# Altium PCB LEDArrayFPC_24LED.PcbDoc (part 2 of 2)
Units mil, origin at the board's own origin, x right, y up, seen from the top; angles counter-clockwise.
Board outline 6000 x 4000 mil, 2 copper layers (Top Layer, Bottom Layer); 48 components, 25 nets, 486 pads, 144 vias.
Unrouted connection lines stored in the file: 29.
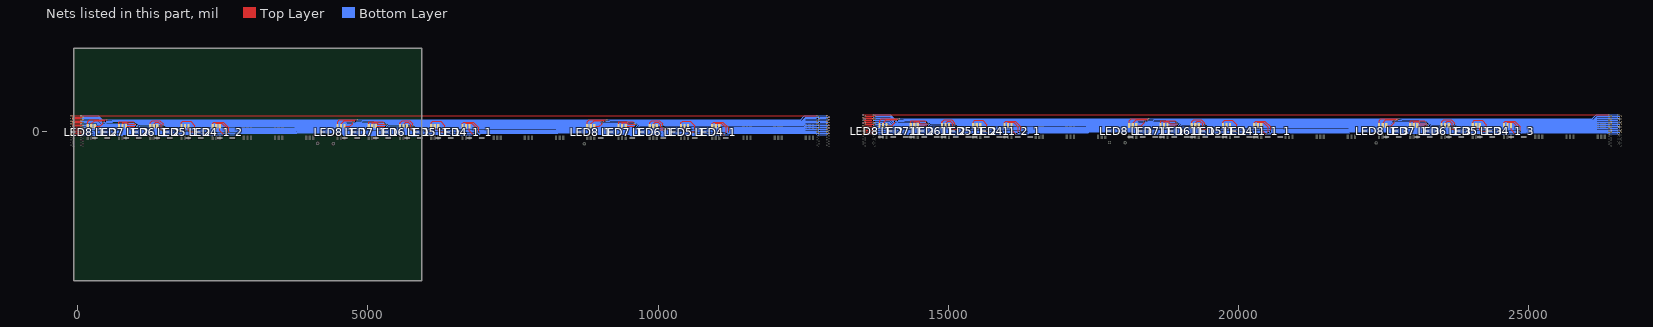
[diagram p2: the nets of this part, all layers, seen from the top]

## Via types
v1: diameter 23.62, hole 11.81, Top Layer to Bottom Layer, 144 vias

## Nets (pads, with @x,y where several pads share a name; then routed paths per layer and width w, separated by ;. In a path a pad name is that pad's centre, name@x,y a point inside that pad or via, vN(x,y) a via of type N, cw(c..) or ccw(c..) an arc to the next point about the centre after c; other vN are vias at no path point) (continued)
L10: LED4_1.6 LED4_1_1.6 LED4_1_1_1.6 LED4_1_2.6 LED4_1_2_1.6 LED4_1_3.6 pad.@54,-57 pad.@12744,-57 pad.@12909,-57 pad.@13534,-42 pad.@13699,-42 pad.@26389,-42 pad.@26554,-42 pad.@-111,-57 | length 27646.9
  Top Layer w10: pad.@-111,-57 -56,-57 ; LED4_1_2.6@2450.17,83.08 LED4_1_2.6@2446,83.08 2445.99,10.51 2514,-57.5 v1(2530.09,-57.5) ; LED4_1_1.6@6754.74,83.08 LED4_1_1.6@6750.56,83.08 6750.56,10.51 6818.57,-57.5 v1(6834.66,-57.5) ; LED4_1.6@11059.31,83.08 LED4_1.6@11055.13,83.08 11055.13,10.51 11123.14,-57.5 v1(11139.22,-57.5) ; pad.@13534,-42 13589,-42 ; LED4_1_2_1.6@16095.17,98.08 LED4_1_2_1.6@16091,98.08 16090.99,25.51 16159,-42.5 v1(16175.09,-42.5) ; LED4_1_1_1.6@20399.74,98.08 LED4_1_1_1.6@20395.56,98.08 20395.56,25.51 20463.57,-42.5 v1(20479.66,-42.5) ; LED4_1_3.6@24704.31,98.08 LED4_1_3.6@24700.13,98.08 24700.13,25.51 24768.14,-42.5 v1(24784.22,-42.5)
  Top Layer w15: -56,-57 pad.@54,-57 ; 13589,-42 pad.@13699,-42
  Bottom Layer w10: pad.@54,-57 267.73,-57 276.23,-65.5 768.07,-65.5 782.07,-51.5 893.56,-51.5 919.4,-77.34 1081.91,-77.34 1104.75,-54.5 1418.49,-54.5 1448.34,-84.34 1531.88,-84.34 1561.72,-54.5 1966.22,-54.5 1980.22,-68.5 2057.16,-68.5 2068.16,-57.5 v1(2530.09,-57.5) ; v1@2534.09,-61.5 2544.38,-61.5 2544.57,-61.31 2732.19,-61.31 2754,-39.5 3771.07,-39.5 3775.07,-35.5 3775.35,-35.5 3786.35,-24.5 4539.61,-24.5 4580.61,-65.5 5212.13,-65.5 5223.97,-77.34 5386.48,-77.34 5409.32,-54.5 5723.06,-54.5 5752.91,-84.34 5836.45,-84.34 5866.29,-54.5 6270.79,-54.5 6284.79,-68.5 6361.73,-68.5 6372.73,-57.5 v1(6834.66,-57.5) ; v1@6838.66,-61.5 6848.95,-61.5 6849.13,-61.31 6919.73,-61.31 6941.54,-39.5 8271.08,-39.5 8284.08,-26.5 8915,-26.5 8940,-51.5 9502.7,-51.5 9528.54,-77.34 9691.05,-77.34 9713.89,-54.5 10027.63,-54.5 10057.47,-84.34 10141.01,-84.34 10170.86,-54.5 10575.36,-54.5 10589.36,-68.5 10666.3,-68.5 10677.3,-57.5 v1(11139.22,-57.5) 11143.22,-61.5 11153.51,-61.5 11153.7,-61.31 11224.3,-61.31 11246.11,-39.5 12713.68,-39.5 12723.99,-49.81 12736.81,-49.81 pad.@12744,-57 12799,-57 ; pad.@13699,-42 13912.73,-42 13921.23,-50.5 14413.07,-50.5 14427.07,-36.5 14538.56,-36.5 14564.4,-62.34 14726.91,-62.34 14749.75,-39.5 15063.49,-39.5 15093.34,-69.34 15176.88,-69.34 15206.72,-39.5 15611.22,-39.5 15625.22,-53.5 15702.16,-53.5 15713.16,-42.5 v1(16175.09,-42.5) ; v1@16179.09,-46.5 16189.38,-46.5 16189.57,-46.31 16377.19,-46.31 16399,-24.5 17416.07,-24.5 17420.07,-20.5 17420.35,-20.5 17431.35,-9.5 18184.61,-9.5 18225.61,-50.5 18857.13,-50.5 18868.97,-62.34 19031.48,-62.34 19054.32,-39.5 19368.06,-39.5 19397.91,-69.34 19481.45,-69.34 19511.29,-39.5 19915.79,-39.5 19929.79,-53.5 20006.73,-53.5 20017.73,-42.5 v1(20479.66,-42.5) ; v1@20483.66,-46.5 20493.95,-46.5 20494.13,-46.31 20564.73,-46.31 20586.54,-24.5 21916.08,-24.5 21929.08,-11.5 22560,-11.5 22585,-36.5 23147.7,-36.5 23173.54,-62.34 23336.05,-62.34 23358.89,-39.5 23672.63,-39.5 23702.47,-69.34 23786.01,-69.34 23815.86,-39.5 24220.36,-39.5 24234.36,-53.5 24311.3,-53.5 24322.3,-42.5 v1(24784.22,-42.5) 24788.22,-46.5 24798.51,-46.5 24798.7,-46.31 24869.3,-46.31 24891.11,-24.5 26358.68,-24.5 26368.99,-34.81 26381.81,-34.81 pad.@26389,-42 26444,-42
  Bottom Layer w15: 12799,-57 pad.@12909,-57 ; 26444,-42 pad.@26554,-42
L11: LED4_1.4 LED4_1_1.4 LED4_1_1_1.4 LED4_1_2.4 LED4_1_2_1.4 LED4_1_3.4 pad.@89,-34 pad.@12779,-34 pad.@12944,-34 pad.@13569,-19 pad.@13734,-19 pad.@26424,-19 pad.@26589,-19 pad.@-76,-34 | length 28811.5
  Top Layer w10: 39,-34 pad.@89,-34 ; LED4_1_2.4@2384.97,83.08 2388.86,86.97 2388.86,140.41 2481.86,140.41 2564.84,57.43 2564.84,-37.26 v1(2566.09,-38.5) ; LED4_1_1.4@6689.54,83.08 6693.43,86.97 6693.43,140.41 6786.43,140.41 6869.41,57.43 6869.41,-37.26 v1(6870.66,-38.5) ; LED4_1.4@10994.11,83.08 10998,86.97 10998,140.41 11091,140.41 11173.98,57.43 11173.98,-37.26 v1(11175.22,-38.5) ; 13684,-19 pad.@13734,-19 ; LED4_1_2_1.4@16029.97,98.08 16033.86,101.97 16033.86,155.41 16126.86,155.41 16209.84,72.43 16209.84,-22.26 v1(16211.09,-23.5) ; LED4_1_1_1.4@20334.54,98.08 20338.43,101.97 20338.43,155.41 20431.43,155.41 20514.41,72.43 20514.41,-22.26 v1(20515.66,-23.5) ; LED4_1_3.4@24639.11,98.08 24643,101.97 24643,155.41 24736,155.41 24818.98,72.43 24818.98,-22.26 v1(24820.22,-23.5)
  Top Layer w15: pad.@-76,-34 39,-34 ; pad.@13569,-19 13684,-19
  Bottom Layer w10: pad.@89,-34 267.35,-34 279.85,-46.5 290.11,-46.5 293.11,-49.5 761.44,-49.5 775.44,-35.5 900.19,-35.5 926.03,-61.34 1075.28,-61.34 1098.13,-38.5 1425.12,-38.5 1454.96,-68.34 1525.25,-68.34 1555.09,-38.5 1972.85,-38.5 1986.85,-52.5 2050.53,-52.5 2069.53,-33.5 2561.09,-33.5 v1(2566.09,-38.5) 2566.9,-39.31 2729.19,-39.31 2745,-23.5 3764.44,-23.5 3768.44,-19.5 3768.73,-19.5 3779.73,-8.5 4546.24,-8.5 4587.24,-49.5 5218.76,-49.5 5230.6,-61.34 5379.85,-61.34 5402.69,-38.5 5729.69,-38.5 5759.53,-68.34 5829.82,-68.34 5859.66,-38.5 6277.42,-38.5 6291.42,-52.5 6355.1,-52.5 6367.1,-40.5 6379.03,-40.5 6380.03,-41.5 6393.28,-41.5 6401.28,-33.5 6865.66,-33.5 v1(6870.66,-38.5) 6880.66,-28.5 6889.4,-28.5 6900.21,-39.31 6919.1,-39.31 6934.92,-23.5 8261.25,-23.5 8274.25,-10.5 8926.92,-10.5 8951.92,-35.5 9509.32,-35.5 9535.17,-61.34 9684.42,-61.34 9707.26,-38.5 10034.26,-38.5 10064.1,-68.34 10134.39,-68.34 10164.23,-38.5 10581.99,-38.5 10595.99,-52.5 10659.67,-52.5 10678.67,-33.5 11170.22,-33.5 v1(11175.22,-38.5) 11185.22,-28.5 11193.96,-28.5 11204.78,-39.31 11223.67,-39.31 11239.48,-23.5 12720.3,-23.5 12730.61,-33.81 12778.81,-33.81 pad.@12779,-34 ; 2595.64,-39.31 2614.54,-39.31 ; 12894,-34 pad.@12944,-34 ; pad.@13734,-19 13912.35,-19 13924.85,-31.5 13935.11,-31.5 13938.11,-34.5 14406.44,-34.5 14420.44,-20.5 14545.19,-20.5 14571.03,-46.34 14720.28,-46.34 14743.13,-23.5 15070.12,-23.5 15099.96,-53.34 15170.25,-53.34 15200.09,-23.5 15617.85,-23.5 15631.85,-37.5 15695.53,-37.5 15714.53,-18.5 16206.09,-18.5 v1(16211.09,-23.5) 16211.9,-24.31 16374.19,-24.31 16390,-8.5 17409.44,-8.5 17413.44,-4.5 17413.73,-4.5 17424.73,6.5 18191.24,6.5 18232.24,-34.5 18863.76,-34.5 18875.6,-46.34 19024.85,-46.34 19047.69,-23.5 19374.69,-23.5 19404.53,-53.34 19474.82,-53.34 19504.66,-23.5 19922.42,-23.5 19936.42,-37.5 20000.1,-37.5 20012.1,-25.5 20024.03,-25.5 20025.03,-26.5 20038.28,-26.5 20046.28,-18.5 20510.66,-18.5 v1(20515.66,-23.5) 20525.66,-13.5 20534.4,-13.5 20545.21,-24.31 20564.1,-24.31 20579.92,-8.5 21906.25,-8.5 21919.25,4.5 22571.92,4.5 22596.92,-20.5 23154.32,-20.5 23180.17,-46.34 23329.42,-46.34 23352.26,-23.5 23679.26,-23.5 23709.1,-53.34 23779.39,-53.34 23809.23,-23.5 24226.99,-23.5 24240.99,-37.5 24304.67,-37.5 24323.67,-18.5 24815.22,-18.5 v1(24820.22,-23.5) 24830.22,-13.5 24838.96,-13.5 24849.78,-24.31 24868.67,-24.31 24884.48,-8.5 26365.3,-8.5 26375.61,-18.81 26423.81,-18.81 pad.@26424,-19 ; 16240.64,-24.31 16259.54,-24.31 ; 26539,-19 pad.@26589,-19
  Bottom Layer w15: pad.@12779,-34 12894,-34 ; pad.@26424,-19 26539,-19
L12: LED4_1.2 LED4_1_1.2 LED4_1_1_1.2 LED4_1_2.2 LED4_1_2_1.2 LED4_1_3.2 pad.@54,-11 pad.@12744,-11 pad.@12909,-11 pad.@13534,4 pad.@13699,4 pad.@26389,4 pad.@26554,4 pad.@-111,-11 | length 29493.5
  Top Layer w10: pad.@-111,-11 -56,-11 ; LED4_1_2.2@2323.95,83.08 2323.95,133.5 2346.86,156.41 2507.86,156.41 2605.09,59.18 v1(2605.09,-16.5) ; LED4_1_1.2@6628.52,83.08 6628.52,133.5 6651.43,156.41 6812.43,156.41 6909.66,59.18 v1(6909.66,-16.5) ; LED4_1.2@10933.08,83.08 10933.08,133.5 10956,156.41 11117,156.41 11214.22,59.18 v1(11214.22,-16.5) ; pad.@13534,4 13589,4 ; LED4_1_2_1.2@15968.95,98.08 15968.95,148.5 15991.86,171.41 16152.86,171.41 16250.09,74.18 v1(16250.09,-1.5) ; LED4_1_1_1.2@20273.52,98.08 20273.52,148.5 20296.43,171.41 20457.43,171.41 20554.66,74.18 v1(20554.66,-1.5) ; LED4_1_3.2@24578.08,98.08 24578.08,148.5 24601,171.41 24762,171.41 24859.22,74.18 v1(24859.22,-1.5)
  Top Layer w15: -56,-11 pad.@54,-11 ; 13589,4 pad.@13699,4
  Bottom Layer w8: 1978.07,-22.5 1993.07,-37.5 2044.32,-37.5 2056.32,-25.5 ; 6282.63,-22.5 6297.63,-37.5 ; 15623.07,-7.5 15638.07,-22.5 15689.32,-22.5 15701.32,-10.5 ; 19927.63,-7.5 19942.63,-22.5
  Bottom Layer w10: pad.@54,-11 266.98,-11 286.48,-30.5 757.81,-30.5 768.81,-19.5 906.82,-19.5 932.66,-45.34 1068.66,-45.34 1091.5,-22.5 1431.75,-22.5 1461.59,-52.34 1518.62,-52.34 1548.47,-22.5 1978.07,-22.5 1979.48,-22.5 1993.48,-36.5 2043.91,-36.5 2067.91,-12.5 2601.09,-12.5 v1(2605.09,-16.5) 2614.09,-7.5 3757.81,-7.5 3761.81,-3.5 3762.1,-3.5 3773.1,7.5 4552.86,7.5 4593.86,-33.5 5225.39,-33.5 5234.76,-42.87 5237.23,-45.34 5373.22,-45.34 5396.07,-22.5 5736.32,-22.5 5766.16,-52.34 5823.19,-52.34 5853.03,-22.5 6282.63,-22.5 6284.05,-22.5 6298.05,-36.5 6347,-36.5 6366.19,-17.31 6394.85,-17.31 6399.66,-12.5 6905.66,-12.5 v1(6909.66,-16.5) 6918.66,-7.5 8254.63,-7.5 8267.63,5.5 8933.54,5.5 8958.54,-19.5 9515.95,-19.5 9541.79,-45.34 9677.79,-45.34 9700.64,-22.5 10040.89,-22.5 10070.73,-52.34 10127.76,-52.34 10157.6,-22.5 10588.62,-22.5 10602.43,-36.31 10638.58,-36.31 10662.4,-12.5 11210.22,-12.5 v1(11214.22,-16.5) 11223.22,-7.5 12740.5,-7.5 pad.@12744,-11 12799,-11 ; pad.@13699,4 13911.98,4 13931.48,-15.5 14402.81,-15.5 14413.81,-4.5 14551.82,-4.5 14577.66,-30.34 14713.66,-30.34 14736.5,-7.5 15076.75,-7.5 15106.59,-37.34 15163.62,-37.34 15193.47,-7.5 15623.07,-7.5 15624.48,-7.5 15638.48,-21.5 15688.91,-21.5 15712.91,2.5 16246.09,2.5 v1(16250.09,-1.5) 16259.09,7.5 17402.81,7.5 17406.81,11.5 17407.1,11.5 17418.1,22.5 18197.86,22.5 18238.86,-18.5 18870.39,-18.5 18879.76,-27.87 18882.23,-30.34 19018.22,-30.34 19041.07,-7.5 19381.32,-7.5 19411.16,-37.34 19468.19,-37.34 19498.03,-7.5 19927.63,-7.5 19929.05,-7.5 19943.05,-21.5 19992,-21.5 20011.19,-2.31 20039.85,-2.31 20044.66,2.5 20550.66,2.5 v1(20554.66,-1.5) 20563.66,7.5 21899.63,7.5 21912.63,20.5 22578.54,20.5 22603.54,-4.5 23160.95,-4.5 23186.79,-30.34 23322.79,-30.34 23345.64,-7.5 23685.89,-7.5 23715.73,-37.34 23772.76,-37.34 23802.6,-7.5 24233.62,-7.5 24247.43,-21.31 24283.58,-21.31 24307.4,2.5 24855.22,2.5 v1(24859.22,-1.5) 24868.22,7.5 26385.5,7.5 pad.@26389,4 26444,4
  Bottom Layer w15: 12799,-11 pad.@12909,-11 ; 26444,4 pad.@26554,4
L13: LED5_1.6 LED5_1_1.6 LED5_1_1_1.6 LED5_1_2.6 LED5_1_2_1.6 LED5_1_3.6 pad.@89,12 pad.@12779,12 pad.@12944,12 pad.@13569,27 pad.@13734,27 pad.@26424,27 pad.@26589,27 pad.@-76,12 | length 27638.4
  Top Layer w10: 39,12 pad.@89,12 ; LED5_1_2.6@1907.92,83.08 1907.93,13.57 1935,-13.5 v1(2020,-13.5) ; LED5_1_1.6@6212.49,83.08 6212.49,13.57 6239.57,-13.5 v1(6324.57,-13.5) ; LED5_1.6@10517.06,83.08 10517.06,13.57 10544.14,-13.5 v1(10629.14,-13.5) ; 13684,27 pad.@13734,27 ; LED5_1_2_1.6@15552.92,98.08 15552.92,28.57 15580,1.5 v1(15665,1.5) ; LED5_1_1_1.6@19857.49,98.08 19857.49,28.57 19884.57,1.5 v1(19969.57,1.5) ; LED5_1_3.6@24162.06,98.08 24162.06,28.57 24189.14,1.5 v1(24274.14,1.5)
  Top Layer w15: pad.@-76,12 39,12 ; pad.@13569,27 13684,27
  Bottom Layer w10: pad.@89,12 266.61,12 293.11,-14.5 751.19,-14.5 762.19,-3.5 913.44,-3.5 939.29,-29.34 1062.03,-29.34 1084.87,-6.5 1438.38,-6.5 1468.22,-36.34 1512,-36.34 1541.84,-6.5 1986.11,-6.5 1993.11,-13.5 v1(2020,-13.5) 2040,-13.5 2062.11,8.61 3751.3,8.61 3755.19,12.5 3755.47,12.5 3766.47,23.5 4559.68,23.5 4597.68,-14.5 5229.01,-14.5 5243.85,-29.34 5366.6,-29.34 5389.44,-6.5 5742.94,-6.5 5772.79,-36.34 5816.56,-36.34 5846.41,-6.5 6317.57,-6.5 v1(6324.57,-13.5) 6336.76,-1.31 6375.07,-1.31 6385,8.61 8248.11,8.61 8261,21.5 8940.17,21.5 8960.17,1.5 9517.58,1.5 9548.42,-29.34 9671.17,-29.34 9694.01,-6.5 10047.51,-6.5 10077.36,-36.34 10121.13,-36.34 10150.97,-6.5 10622.14,-6.5 v1(10629.14,-13.5) 10635.84,-13.5 10657.95,8.61 12537.26,8.61 12540.64,12 pad.@12779,12 ; 12894,12 pad.@12944,12 ; pad.@13734,27 13911.61,27 13938.11,0.5 14396.19,0.5 14407.19,11.5 14558.44,11.5 14584.29,-14.34 14707.03,-14.34 14729.87,8.5 15083.38,8.5 15113.22,-21.34 15157,-21.34 15186.84,8.5 15631.11,8.5 15638.11,1.5 v1(15665,1.5) 15685,1.5 15707.11,23.61 17396.3,23.61 17400.19,27.5 17400.47,27.5 17411.47,38.5 18204.68,38.5 18242.68,0.5 18874.01,0.5 18888.85,-14.34 19011.6,-14.34 19034.44,8.5 19387.94,8.5 19417.79,-21.34 19461.56,-21.34 19491.41,8.5 19962.57,8.5 v1(19969.57,1.5) 19981.76,13.69 20020.08,13.69 20030,23.61 21893.11,23.61 21906,36.5 22585.17,36.5 22605.17,16.5 23162.58,16.5 23193.42,-14.34 23316.17,-14.34 23339.01,8.5 23692.51,8.5 23722.36,-21.34 23766.13,-21.34 23795.97,8.5 24267.14,8.5 v1(24274.14,1.5) 24280.84,1.5 24302.95,23.61 26182.26,23.61 26185.64,27 pad.@26424,27 ; 26539,27 pad.@26589,27
  Bottom Layer w15: pad.@12779,12 12894,12 ; pad.@26424,27 26539,27
L14: LED5_1.4 LED5_1_1.4 LED5_1_1_1.4 LED5_1_2.4 LED5_1_2_1.4 LED5_1_3.4 pad.@54,35 pad.@12744,35 pad.@12909,35 pad.@13534,50 pad.@13699,50 pad.@26389,50 pad.@26554,50 pad.@-111,35 | length 26846.9
  Top Layer w10: pad.@-111,35 -56,35 ; v1(1845,21.5) 1845,81.18 LED5_1_2.4@1846.9,83.08 ; v1(6149.57,21.5) 6149.57,81.18 LED5_1_1.4@6151.47,83.08 ; v1(10454.14,21.5) 10454.14,81.18 LED5_1.4@10456.04,83.08 ; pad.@13534,50 13589,50 ; v1(15490,36.5) 15490,96.18 LED5_1_2_1.4@15491.9,98.08 ; v1(19794.57,36.5) 19794.57,96.18 LED5_1_1_1.4@19796.47,98.08 ; v1(24099.14,36.5) 24099.14,96.18 LED5_1_3.4@24101.04,98.08
  Top Layer w15: -56,35 pad.@54,35 ; 13589,50 pad.@13699,50
  Bottom Layer w8: 1470,-15.5 1507.51,-15.5 1531.51,8.5 1588.09,8.5 1589.09,9.5 ; 5774.57,-15.5 5812.07,-15.5 5836.07,8.5 5892.66,8.5 5893.66,9.5 ; 10079.14,-15.5 10116.64,-15.5 10140.64,8.5 10197.22,8.5 10198.22,9.5 ; 15115,-0.5 15152.51,-0.5 15176.51,23.5 15233.09,23.5 15234.09,24.5 ; 19419.57,-0.5 19457.07,-0.5 19481.07,23.5 19537.66,23.5 19538.66,24.5 ; 23724.14,-0.5 23761.64,-0.5 23785.64,23.5 23842.22,23.5 23843.22,24.5
  Bottom Layer w10: pad.@54,35 280.77,35 313.11,2.66 745.72,2.66 755.56,12.5 920.07,12.5 945.91,-13.34 1055.4,-13.34 1078.24,9.5 1445,9.5 1470,-15.5 ; 1589.09,9.5 1630,9.5 1642,21.5 v1(1845,21.5) 1975,21.5 1985,11.5 2030,11.5 2044.08,25.58 2044.08,26.5 3746.56,26.5 3748.56,28.5 3748.84,28.5 3759.84,39.5 4566.3,39.5 4603.15,2.66 5234.48,2.66 5250.48,-13.34 5359.97,-13.34 5382.81,9.5 5749.57,9.5 5774.57,-15.5 ; 5893.66,9.5 5950,9.5 5962,21.5 v1(6149.57,21.5) 6156.38,14.69 6336.83,14.69 6348.64,26.5 8243.37,26.5 8254.37,37.5 8946.8,37.5 8966.8,17.5 9524.21,17.5 9524.34,17.37 9555.05,-13.34 9664.54,-13.34 9687.38,9.5 10054.14,9.5 10079.14,-15.5 ; 10198.22,9.5 10220,9.5 10232,21.5 v1(10454.14,21.5) 10460.95,14.69 10641.4,14.69 10653.21,26.5 12532.52,26.5 12541.02,35 pad.@12744,35 12799,35 ; pad.@13699,50 13925.77,50 13958.11,17.66 14390.72,17.66 14400.56,27.5 14565.07,27.5 14590.91,1.66 14700.4,1.66 14723.24,24.5 15090,24.5 15115,-0.5 ; 15234.09,24.5 15275,24.5 15287,36.5 v1(15490,36.5) 15620,36.5 15630,26.5 15675,26.5 15689.08,40.58 15689.08,41.5 17391.56,41.5 17393.56,43.5 17393.84,43.5 17404.84,54.5 18211.3,54.5 18248.15,17.66 18879.48,17.66 18895.48,1.66 19004.97,1.66 19027.81,24.5 19394.57,24.5 19419.57,-0.5 ; 19538.66,24.5 19595,24.5 19607,36.5 v1(19794.57,36.5) 19801.38,29.69 19981.83,29.69 19993.64,41.5 21888.37,41.5 21899.37,52.5 22591.8,52.5 22611.8,32.5 23169.21,32.5 23169.34,32.37 23200.05,1.66 23309.54,1.66 23332.38,24.5 23699.14,24.5 23724.14,-0.5 ; 23843.22,24.5 23865,24.5 23877,36.5 v1(24099.14,36.5) 24105.95,29.69 24286.4,29.69 24298.21,41.5 26177.52,41.5 26186.02,50 pad.@26389,50 26444,50
  Bottom Layer w15: 12799,35 pad.@12909,35 ; 26444,50 pad.@26554,50
L15: LED5_1.2 LED5_1_1.2 LED5_1_1_1.2 LED5_1_2.2 LED5_1_2_1.2 LED5_1_3.2 pad.@89,58 pad.@12779,58 pad.@12944,58 pad.@13569,73 pad.@13734,73 pad.@26424,73 pad.@26589,73 pad.@-76,58 | length 28805.8
  Top Layer w10: 39,58 pad.@89,58 ; LED5_1_2.2@1785.88,83.08 1785.88,143.43 1812.86,170.41 1946.84,170.41 2019.09,98.16 v1(2019.09,37.5) ; LED5_1_1.2@6090.45,83.08 6090.44,143.43 6117.43,170.41 6251.41,170.41 6323.66,98.16 v1(6323.66,37.5) ; LED5_1.2@10395.01,83.08 10395.01,143.43 10422,170.41 10555.98,170.41 10628.22,98.16 v1(10628.22,37.5) ; 13684,73 pad.@13734,73 ; LED5_1_2_1.2@15430.88,98.08 15430.88,158.43 15457.86,185.41 15591.84,185.41 15664.09,113.16 v1(15664.09,52.5) ; LED5_1_1_1.2@19735.45,98.08 19735.44,158.43 19762.43,185.41 19896.41,185.41 19968.66,113.16 v1(19968.66,52.5) ; LED5_1_3.2@24040.01,98.08 24040.01,158.43 24067,185.41 24200.98,185.41 24273.22,113.16 v1(24273.22,52.5)
  Top Layer w15: pad.@-76,58 39,58 ; pad.@13569,73 13684,73
  Bottom Layer w10: pad.@89,58 293.61,58 323.11,28.5 926.7,28.5 952.54,2.66 1048.77,2.66 1071.62,25.5 1455.48,25.5 1474.72,6.26 1507.48,6.26 1525.72,24.5 1575.09,24.5 1595.09,44.5 1995.11,44.5 2002.11,37.5 v1(2019.09,37.5) 2026.09,44.5 3742.22,44.5 3753.22,55.5 4572.93,55.5 4599.93,28.5 5231.27,28.5 5257.11,2.66 5353.34,2.66 5376.18,25.5 5760.05,25.5 5779.28,6.26 5812.05,6.26 5830.28,24.5 5879.66,24.5 5899.66,44.5 6299.68,44.5 6306.68,37.5 v1(6323.66,37.5) 6339.66,53.5 8953.42,53.5 8973.42,33.5 9530.83,33.5 9540.21,24.13 9561.68,2.66 9657.91,2.66 9680.75,25.5 10064.62,25.5 10083.85,6.26 10116.62,6.26 10134.85,24.5 10184.22,24.5 10204.22,44.5 10604.24,44.5 10611.24,37.5 v1(10628.22,37.5) 10634.22,43.5 12526.89,43.5 12541.39,58 pad.@12779,58 ; 12894,58 pad.@12944,58 ; pad.@13734,73 13938.61,73 13968.11,43.5 14571.7,43.5 14597.54,17.66 14693.77,17.66 14716.62,40.5 15100.48,40.5 15119.72,21.26 15152.48,21.26 15170.72,39.5 15220.09,39.5 15240.09,59.5 15640.11,59.5 15647.11,52.5 v1(15664.09,52.5) 15671.09,59.5 17387.22,59.5 17398.22,70.5 18217.93,70.5 18244.93,43.5 18876.27,43.5 18902.11,17.66 18998.34,17.66 19021.18,40.5 19405.05,40.5 19424.28,21.26 19457.05,21.26 19475.28,39.5 19524.66,39.5 19544.66,59.5 19944.68,59.5 19951.68,52.5 v1(19968.66,52.5) 19984.66,68.5 22598.42,68.5 22618.42,48.5 23175.83,48.5 23185.21,39.13 23206.68,17.66 23302.91,17.66 23325.75,40.5 23709.62,40.5 23728.85,21.26 23761.62,21.26 23779.85,39.5 23829.22,39.5 23849.22,59.5 24249.24,59.5 24256.24,52.5 v1(24273.22,52.5) 24279.22,58.5 26171.89,58.5 26186.39,73 pad.@26424,73 ; 26539,73 pad.@26589,73
  Bottom Layer w15: pad.@12779,58 12894,58 ; pad.@26424,73 26539,73
L16: LED6_1.6 LED6_1_1.6 LED6_1_1_1.6 LED6_1_2.6 LED6_1_2_1.6 LED6_1_3.6 pad.@54,81 pad.@12744,81 pad.@12909,81 pad.@13534,96 pad.@13699,96 pad.@26389,96 pad.@26554,96 pad.@-111,81 | length 27612.9
  Top Layer w10: pad.@-111,81 -56,81 ; LED6_1_2.6@1369.85,83.08 1430.67,22.26 1500.85,22.26 v1(1532.09,53.5) ; LED6_1_1.6@5674.42,83.08 5735.24,22.26 5805.42,22.26 v1(5836.66,53.5) ; LED6_1.6@9978.99,83.08 10039.81,22.26 10109.99,22.26 v1(10141.22,53.5) ; pad.@13534,96 13589,96 ; LED6_1_2_1.6@15014.85,98.08 15075.67,37.26 15145.85,37.26 v1(15177.09,68.5) ; LED6_1_1_1.6@19319.42,98.08 19380.24,37.26 19450.42,37.26 v1(19481.66,68.5) ; LED6_1_3.6@23623.99,98.08 23684.81,37.26 23754.99,37.26 v1(23786.22,68.5)
  Top Layer w15: -56,81 pad.@54,81 ; 13589,96 pad.@13699,96
  Bottom Layer w10: pad.@54,81 306.61,81 343.11,44.5 933.33,44.5 959.17,18.66 1042.15,18.66 1064.99,41.5 1462.11,41.5 1481.34,22.26 1500.85,22.26 v1(1532.09,53.5) 1542.09,63.5 3738.59,63.5 3746.59,71.5 4579.56,71.5 4606.56,44.5 5237.89,44.5 5263.74,18.66 5346.71,18.66 5369.56,41.5 5766.68,41.5 5785.91,22.26 5805.42,22.26 v1(5836.66,53.5) 5852.66,69.5 8960.05,69.5 8980.05,49.5 9537.46,49.5 9556.21,30.75 9568.3,18.66 9651.28,18.66 9674.13,41.5 10071.24,41.5 10090.48,22.26 10109.99,22.26 v1(10141.22,53.5) 10151.22,63.5 12524.26,63.5 12541.76,81 pad.@12744,81 12799,81 ; pad.@13699,96 13951.61,96 13988.11,59.5 14578.33,59.5 14604.17,33.66 14687.15,33.66 14709.99,56.5 15107.11,56.5 15126.34,37.26 15145.85,37.26 v1(15177.09,68.5) 15187.09,78.5 17383.59,78.5 17391.59,86.5 18224.56,86.5 18251.56,59.5 18882.89,59.5 18908.74,33.66 18991.71,33.66 19014.56,56.5 19411.68,56.5 19430.91,37.26 19450.42,37.26 v1(19481.66,68.5) 19497.66,84.5 22605.05,84.5 22625.05,64.5 23182.46,64.5 23201.21,45.75 23213.3,33.66 23296.28,33.66 23319.13,56.5 23716.24,56.5 23735.48,37.26 23754.99,37.26 v1(23786.22,68.5) 23796.22,78.5 26169.26,78.5 26186.76,96 pad.@26389,96 26444,96
  Bottom Layer w15: 12799,81 pad.@12909,81 ; 26444,96 pad.@26554,96
L17: LED6_1.4 LED6_1_1.4 LED6_1_1_1.4 LED6_1_2.4 LED6_1_2_1.4 LED6_1_3.4 pad.@89,104 pad.@12779,104 pad.@12944,104 pad.@13569,119 pad.@13734,119 pad.@26424,119 pad.@26589,119 pad.@-76,104 | length 28128.7
  Top Layer w10: 39,104 pad.@89,104 ; LED6_1_2.4@1308.83,83.08 1308.83,120.33 1345,156.5 1390,156.5 1435,111.5 1435,66.5 1446,55.5 v1(1491.09,55.5) ; LED6_1_1.4@5613.4,83.08 5613.4,120.33 5649.57,156.5 5694.57,156.5 5739.57,111.5 5739.57,66.5 5750.57,55.5 v1(5795.66,55.5) ; LED6_1.4@9917.97,83.08 9917.97,120.33 9954.14,156.5 9999.14,156.5 10044.14,111.5 10044.14,66.5 10055.14,55.5 v1(10100.22,55.5) ; 13684,119 pad.@13734,119 ; LED6_1_2_1.4@14953.83,98.08 14953.83,135.33 14990,171.5 15035,171.5 15080,126.5 15080,81.5 15091,70.5 v1(15136.09,70.5) ; LED6_1_1_1.4@19258.4,98.08 19258.4,135.33 19294.57,171.5 19339.57,171.5 19384.57,126.5 19384.57,81.5 19395.57,70.5 v1(19440.66,70.5) ; LED6_1_3.4@23562.97,98.08 23562.97,135.33 23599.14,171.5 23644.14,171.5 23689.14,126.5 23689.14,81.5 23700.14,70.5 v1(23745.22,70.5)
  Top Layer w15: pad.@-76,104 39,104 ; pad.@13569,119 13684,119
  Bottom Layer w10: pad.@89,104 314.61,104 358.11,60.5 939.95,60.5 965.8,34.66 1035.52,34.66 1060.36,59.5 v1@1487.09,59.5 ; v1(1491.09,55.5) 1523.09,87.5 4586.19,87.5 4613.19,60.5 5244.52,60.5 5270.36,34.66 5340.09,34.66 5364.93,59.5 v1@5791.66,59.5 ; v1(5795.66,55.5) 5825.66,85.5 8966.68,85.5 8984.68,67.5 9542.09,67.5 9574.93,34.66 9644.66,34.66 9669.5,59.5 v1@10096.22,59.5 ; v1(10100.22,55.5) 10125.22,80.5 12518.64,80.5 12542.14,104 pad.@12779,104 ; 12894,104 pad.@12944,104 ; pad.@13734,119 13959.61,119 14003.11,75.5 14584.95,75.5 14610.8,49.66 14680.52,49.66 14705.36,74.5 v1@15132.09,74.5 ; v1(15136.09,70.5) 15168.09,102.5 18231.19,102.5 18258.19,75.5 18889.52,75.5 18915.36,49.66 18985.09,49.66 19009.93,74.5 v1@19436.66,74.5 ; v1(19440.66,70.5) 19470.66,100.5 22611.68,100.5 22629.68,82.5 23187.09,82.5 23219.93,49.66 23289.66,49.66 23314.5,74.5 v1@23741.22,74.5 ; v1(23745.22,70.5) 23770.22,95.5 26163.64,95.5 26187.14,119 pad.@26424,119 ; 26539,119 pad.@26589,119
  Bottom Layer w15: pad.@12779,104 12894,104 ; pad.@26424,119 26539,119
L18: LED6_1.2 LED6_1_1.2 LED6_1_1_1.2 LED6_1_2.2 LED6_1_2_1.2 LED6_1_3.2 pad.@54,127 pad.@12744,127 pad.@12909,127 pad.@13534,142 pad.@13699,142 pad.@26389,142 pad.@26554,142 pad.@-111,127 | length 28832.5
  Top Layer w10: pad.@-111,127 -56,127 ; v1(1472.09,91.5) 1472.09,124.41 1415,181.5 1285,181.5 1248.86,145.36 ; v1(5776.66,91.5) 5776.66,124.41 5719.57,181.5 5589.57,181.5 5553.43,145.36 ; v1(10081.22,91.5) 10081.22,124.41 10024.14,181.5 9894.14,181.5 9858,145.36 ; pad.@13534,142 13589,142 ; v1(15117.09,106.5) 15117.09,139.41 15060,196.5 14930,196.5 14893.86,160.36 ; v1(19421.66,106.5) 19421.66,139.41 19364.57,196.5 19234.57,196.5 19198.43,160.36 ; v1(23726.22,106.5) 23726.22,139.41 23669.14,196.5 23539.14,196.5 23503,160.36 ; 1248.86,145.36 1248.86,84.14 LED6_1_2.2@1247.81,83.08 1247.81,144.31 1248.86,145.36 ; 5553.43,145.36 5552.38,144.31 LED6_1_1.2@5552.37,83.08 5553.43,84.14 5553.43,145.36 ; 9858,145.36 9856.94,144.31 LED6_1.2@9856.94,83.08 9858,84.14 9858,145.36 ; 14893.86,160.36 14892.81,159.31 LED6_1_2_1.2@14892.81,98.08 14893.86,99.14 14893.86,160.36 ; 19198.43,160.36 19198.43,99.14 LED6_1_1_1.2@19197.37,98.08 19197.38,159.31 19198.43,160.36 ; 23503,160.36 23503,99.14 LED6_1_3.2@23501.94,98.08 23501.94,159.31 23503,160.36
  Top Layer w15: -56,127 pad.@54,127 ; 13589,142 pad.@13699,142
  Bottom Layer w10: pad.@54,127 325.61,127 373.11,79.5 943.58,79.5 972.42,50.66 1028.89,50.66 1075.73,97.5 v1@1465.11,97.5 ; v1(1472.09,91.5) 1484.09,103.5 4592.81,103.5 4616.81,79.5 5248.15,79.5 5276.99,50.66 5333.46,50.66 5380.3,97.5 v1@5769.68,97.5 ; v1(5776.66,91.5) 5786.66,101.5 8973.31,101.5 8991.31,83.5 9548.72,83.5 9559.09,73.13 9581.56,50.66 9638.03,50.66 9684.87,97.5 v1@10074.24,97.5 ; v1(10081.22,91.5) 10088.22,98.5 12514.01,98.5 12542.51,127 pad.@12744,127 12799,127 ; pad.@13699,142 13970.61,142 14018.11,94.5 14588.58,94.5 14617.42,65.66 14673.89,65.66 14720.73,112.5 v1@15110.11,112.5 ; v1(15117.09,106.5) 15129.09,118.5 18237.81,118.5 18261.81,94.5 18893.15,94.5 18921.99,65.66 18978.46,65.66 19025.3,112.5 v1@19414.68,112.5 ; v1(19421.66,106.5) 19431.66,116.5 22618.31,116.5 22636.31,98.5 23193.72,98.5 23204.09,88.13 23226.56,65.66 23283.03,65.66 23329.87,112.5 v1@23719.24,112.5 ; v1(23726.22,106.5) 23733.22,113.5 26159.01,113.5 26187.51,142 pad.@26389,142 26444,142
  Bottom Layer w15: 12799,127 pad.@12909,127 ; 26444,142 pad.@26554,142
L19: LED7_1.6 LED7_1_1.6 LED7_1_1_1.6 LED7_1_2.6 LED7_1_2_1.6 LED7_1_3.6 pad.@89,150 pad.@12779,150 pad.@12944,150 pad.@13569,165 pad.@13734,165 pad.@26424,165 pad.@26589,165 pad.@-76,150 | length 27285.4
  Top Layer w10: 39,150 pad.@89,150 ; LED7_1_2.6@831.78,83.08 995.53,83.08 v1(998.11,80.5) ; LED7_1_1.6@5136.35,83.08 5300.1,83.08 v1(5302.68,80.5) ; LED7_1.6@9440.92,83.08 9604.66,83.08 v1(9607.24,80.5) ; 13684,165 pad.@13734,165 ; LED7_1_2_1.6@14476.78,98.08 14640.53,98.08 v1(14643.11,95.5) ; LED7_1_1_1.6@18781.35,98.08 18945.1,98.08 v1(18947.68,95.5) ; LED7_1_3.6@23085.92,98.08 23249.66,98.08 v1(23252.24,95.5)
  Top Layer w15: pad.@-76,150 39,150 ; pad.@13569,165 13684,165
  Bottom Layer w10: pad.@89,150 329.61,150 383.11,96.5 982.11,96.5 v1(998.11,80.5) 1015.09,80.5 1054.09,119.5 4599.44,119.5 4622.25,96.69 4687.49,96.69 4687.68,96.5 5286.68,96.5 v1(5302.68,80.5) 5319.66,80.5 5356.66,117.5 8980.62,117.5 8997.43,100.69 9587.06,100.69 v1(9607.24,80.5) 9624.22,80.5 9658.22,114.5 12507.38,114.5 12542.88,150 pad.@12779,150 ; 12894,150 pad.@12944,150 ; pad.@13734,165 13974.61,165 14028.11,111.5 14627.11,111.5 v1(14643.11,95.5) 14660.09,95.5 14699.09,134.5 18244.44,134.5 18267.25,111.69 18332.49,111.69 18332.68,111.5 18931.68,111.5 v1(18947.68,95.5) 18964.66,95.5 19001.66,132.5 22625.62,132.5 22642.43,115.69 23232.06,115.69 v1(23252.24,95.5) 23269.22,95.5 23303.22,129.5 26152.38,129.5 26187.88,165 pad.@26424,165 ; 26539,165 pad.@26589,165
  Bottom Layer w15: pad.@12779,150 12894,150 ; pad.@26424,165 26539,165
L20: LED7_1.4 LED7_1_1.4 LED7_1_1_1.4 LED7_1_2.4 LED7_1_2_1.4 LED7_1_3.4 pad.@54,173 pad.@12744,173 pad.@12909,173 pad.@13534,188 pad.@13699,188 pad.@26389,188 pad.@26554,188 pad.@-111,173 | length 28117.6
  Top Layer w10: pad.@-111,173 -56,173 ; LED7_1_2.4@770.76,83.08 770.76,139.31 ; v1(1009.09,116.5) 875,116.5 845,146.5 777.95,146.5 ; LED7_1_1.4@5075.33,83.08 5075.33,139.31 ; v1(5313.66,116.5) 5179.57,116.5 5149.57,146.5 5082.52,146.5 ; LED7_1.4@9379.9,83.08 9379.9,139.31 ; v1(9618.22,116.5) 9484.14,116.5 9454.14,146.5 9387.09,146.5 ; pad.@13534,188 13589,188 ; LED7_1_2_1.4@14415.76,98.08 14415.76,154.31 ; v1(14654.09,131.5) 14520,131.5 14490,161.5 14422.95,161.5 ; LED7_1_1_1.4@18720.33,98.08 18720.33,154.31 ; v1(18958.66,131.5) 18824.57,131.5 18794.57,161.5 18727.52,161.5 ; LED7_1_3.4@23024.9,98.08 23024.9,154.31 ; v1(23263.22,131.5) 23129.14,131.5 23099.14,161.5 23032.09,161.5 ; 770.76,139.31 777.95,146.5 ; 770.76,139.31 777.95,146.5 ; 5075.33,139.31 5082.52,146.5 ; 5075.33,139.31 5082.52,146.5 ; 9379.9,139.31 9387.09,146.5 ; 9379.9,139.31 9387.09,146.5 ; 14415.76,154.31 14422.95,161.5 ; 14415.76,154.31 14422.95,161.5 ; 18720.33,154.31 18727.52,161.5 ; 18720.33,154.31 18727.52,161.5 ; 23024.9,154.31 23032.09,161.5 ; 23024.9,154.31 23032.09,161.5
  Top Layer w15: -56,173 pad.@54,173 ; 13589,188 pad.@13699,188
  Bottom Layer w10: pad.@54,173 338.61,173 398.11,113.5 v1@1006.09,113.5 ; v1(1009.09,116.5) 1028.09,135.5 4606.07,135.5 4628.88,112.69 5309.85,112.69 v1@5310.66,113.5 ; v1(5313.66,116.5) 5330.66,133.5 8987.24,133.5 9004.06,116.69 9596.67,116.69 9604.35,124.37 v1@9615.22,113.5 ; v1(9618.22,116.5) 9632.22,130.5 12500.75,130.5 12543.25,173 pad.@12744,173 12799,173 ; pad.@13699,188 13983.61,188 14043.11,128.5 v1@14651.09,128.5 ; v1(14654.09,131.5) 14673.09,150.5 18251.07,150.5 18273.88,127.69 18954.85,127.69 v1@18955.66,128.5 ; v1(18958.66,131.5) 18975.66,148.5 22632.24,148.5 22649.06,131.69 23241.67,131.69 23249.35,139.37 v1@23260.22,128.5 ; v1(23263.22,131.5) 23277.22,145.5 26145.75,145.5 26188.25,188 pad.@26389,188 26444,188
  Bottom Layer w15: 12799,173 pad.@12909,173 ; 26444,188 pad.@26554,188
L21: LED7_1.2 LED7_1_1.2 LED7_1_1_1.2 LED7_1_2.2 LED7_1_2_1.2 LED7_1_3.2 pad.@89,196 pad.@12779,196 pad.@12944,196 pad.@13569,211 pad.@13734,211 pad.@26424,211 pad.@26589,211 pad.@-76,196 | length 28348.8
  Top Layer w10: 39,196 pad.@89,196 ; LED7_1_2.2@709.74,83.08 709.73,156.5 717.81,164.57 953.02,164.57 v1(978.09,139.5) ; LED7_1_1.2@5014.3,83.08 5014.3,156.5 5022.37,164.57 5257.58,164.57 v1(5282.66,139.5) ; LED7_1.2@9318.87,83.08 9318.87,156.5 9326.94,164.57 9562.15,164.57 v1(9587.22,139.5) ; 13684,211 pad.@13734,211 ; LED7_1_2_1.2@14354.74,98.08 14354.74,171.5 14362.81,179.57 14598.02,179.57 v1(14623.09,154.5) ; LED7_1_1_1.2@18659.3,98.08 18659.3,171.5 18667.37,179.57 18902.58,179.57 v1(18927.66,154.5) ; LED7_1_3.2@22963.87,98.08 22963.87,171.5 22971.94,179.57 23207.15,179.57 v1(23232.22,154.5)
  Top Layer w15: pad.@-76,196 39,196 ; pad.@13569,211 13684,211
  Bottom Layer w10: pad.@89,196 346.61,196 413.11,129.5 810.09,129.5 820.09,139.5 v1(978.09,139.5) 990.09,151.5 4612.7,151.5 4635.51,128.69 5113.85,128.69 5124.66,139.5 v1(5282.66,139.5) 5292.66,149.5 8993.87,149.5 9010.68,132.69 9580.41,132.69 v1(9587.22,139.5) 9595.22,147.5 12495.13,147.5 12543.63,196 pad.@12779,196 ; 12894,196 pad.@12944,196 ; pad.@13734,211 13991.61,211 14058.11,144.5 14455.09,144.5 14465.09,154.5 v1(14623.09,154.5) 14635.09,166.5 18257.7,166.5 18280.51,143.69 18758.85,143.69 18769.66,154.5 v1(18927.66,154.5) 18937.66,164.5 22638.87,164.5 22655.68,147.69 23225.41,147.69 v1(23232.22,154.5) 23240.22,162.5 26140.13,162.5 26188.63,211 pad.@26424,211 ; 26539,211 pad.@26589,211
  Bottom Layer w15: pad.@12779,196 12894,196 ; pad.@26424,211 26539,211
L22: LED8_1.6 LED8_1_1.6 LED8_1_1_1.6 LED8_1_2.6 LED8_1_2_1.6 LED8_1_3.6 pad.@54,219 pad.@12744,219 pad.@12909,219 pad.@13534,234 pad.@13699,234 pad.@26389,234 pad.@26554,234 pad.@-111,219 | length 27515.3
  Top Layer w10: pad.@-111,219 -56,219 ; LED8_1_2.6@293.71,117.26 LED8_1_2.6@293.71,83.08 381.58,83.08 430,131.5 v1(430,156.5) ; LED8_1_1.6@4598.28,117.26 LED8_1_1.6@4598.28,83.08 4686.15,83.08 4734.57,131.5 v1(4734.57,156.5) ; LED8_1.6@8902.85,117.26 LED8_1.6@8902.85,83.08 8990.72,83.08 9039.14,131.5 v1(9039.14,156.5) ; pad.@13534,234 13589,234 ; LED8_1_2_1.6@13938.71,132.26 LED8_1_2_1.6@13938.71,98.08 14026.58,98.08 14075,146.5 v1(14075,171.5) ; LED8_1_1_1.6@18243.28,132.26 LED8_1_1_1.6@18243.28,98.08 18331.15,98.08 18379.57,146.5 v1(18379.57,171.5) ; LED8_1_3.6@22547.85,132.26 LED8_1_3.6@22547.85,98.08 22635.72,98.08 22684.14,146.5 v1(22684.14,171.5)
  Top Layer w15: -56,219 pad.@54,219 ; 13589,234 pad.@13699,234
  Bottom Layer w10: pad.@54,219 354.61,219 417.11,156.5 v1(430,156.5) 462.74,156.5 470.55,148.69 489.45,148.69 497.26,156.5 598,156.5 609,167.5 4619.32,167.5 4623.32,163.5 4727.57,163.5 v1(4734.57,156.5) 4738.19,156.5 4750,144.69 5101.19,144.69 5122,165.5 9030.14,165.5 v1(9039.14,156.5) 9046.95,148.69 9470.19,148.69 9485,163.5 12488.5,163.5 12544,219 pad.@12744,219 12799,219 ; pad.@13699,234 13999.61,234 14062.11,171.5 v1(14075,171.5) 14107.74,171.5 14115.55,163.69 14134.45,163.69 14142.26,171.5 14243,171.5 14254,182.5 18264.32,182.5 18268.32,178.5 18372.57,178.5 v1(18379.57,171.5) 18383.19,171.5 18395,159.69 18746.19,159.69 18767,180.5 22675.14,180.5 v1(22684.14,171.5) 22691.95,163.69 23115.19,163.69 23130,178.5 26133.5,178.5 26189,234 pad.@26389,234 26444,234
  Bottom Layer w15: 12799,219 pad.@12909,219 ; 26444,234 pad.@26554,234
L23: LED8_1.4 LED8_1_1.4 LED8_1_1_1.4 LED8_1_2.4 LED8_1_2_1.4 LED8_1_3.4 pad.@89,242 pad.@12779,242 pad.@12944,242 pad.@13569,257 pad.@13734,257 pad.@26424,257 pad.@26589,257 pad.@-76,242 | length 28111.9
  Top Layer w10: 33,242 pad.@89,242 ; LED8_1_2.4@232.86,83.25 LED8_1_2.4@232.69,83.08 232.69,124.19 290,181.5 465,181.5 475,171.5 v1(480,171.5) ; LED8_1_1.4@4537.43,83.25 LED8_1_1.4@4537.26,83.08 4537.26,124.19 4594.57,181.5 4769.57,181.5 4779.57,171.5 v1(4784.57,171.5) ; LED8_1.4@8842,83.25 LED8_1.4@8841.82,83.08 8841.83,124.19 8899.14,181.5 9074.14,181.5 9084.14,171.5 v1(9089.14,171.5) ; 13678,257 pad.@13734,257 ; LED8_1_2_1.4@13877.86,98.25 LED8_1_2_1.4@13877.69,98.08 13877.69,139.19 13935,196.5 14110,196.5 14120,186.5 v1(14125,186.5) ; LED8_1_1_1.4@18182.43,98.25 LED8_1_1_1.4@18182.26,98.08 18182.26,139.19 18239.57,196.5 18414.57,196.5 18424.57,186.5 v1(18429.57,186.5) ; LED8_1_3.4@22487,98.25 LED8_1_3.4@22486.82,98.08 22486.83,139.19 22544.14,196.5 22719.14,196.5 22729.14,186.5 v1(22734.14,186.5)
  Top Layer w15: pad.@-76,242 33,242 ; pad.@13569,257 13678,257
  Bottom Layer w10: pad.@89,242 354.24,242 414.74,181.5 465,181.5 475,171.5 v1(480,171.5) 481,172.5 590,172.5 601,183.5 4625.95,183.5 4626.95,182.5 4773.57,182.5 v1(4784.57,171.5) 4794.57,161.5 4890,161.5 4910,181.5 4910,182.5 9045.4,182.5 9055.7,172.2 9088.44,172.2 v1(9089.14,171.5) 9170,171.5 9178,179.5 12481.87,179.5 12544.37,242 pad.@12779,242 ; 12888,242 pad.@12944,242 ; pad.@13734,257 13999.24,257 14059.74,196.5 14110,196.5 14120,186.5 v1(14125,186.5) 14126,187.5 14235,187.5 14246,198.5 18270.95,198.5 18271.95,197.5 18418.57,197.5 v1(18429.57,186.5) 18439.57,176.5 18535,176.5 18555,196.5 18555,197.5 22690.4,197.5 22700.7,187.2 22733.44,187.2 v1(22734.14,186.5) 22815,186.5 22823,194.5 26126.87,194.5 26189.37,257 pad.@26424,257 ; 26533,257 pad.@26589,257
  Bottom Layer w15: pad.@12779,242 12888,242 ; pad.@26424,257 26533,257
L24: LED8_1.2 LED8_1_1.2 LED8_1_1_1.2 LED8_1_2.2 LED8_1_2_1.2 LED8_1_3.2 pad.@54,265 pad.@12744,265 pad.@12909,265 pad.@13534,280 pad.@13699,280 pad.@26389,280 pad.@26554,280 pad.@-111,265 | length 54148.9
  Top Layer w10: pad.@-111,265 -56,265 ; pad.@54,265 pad.@12744,265 ; LED8_1_2.2@171.67,83.08 171.66,166.5 202.66,197.5 509,197.5 v1(510,196.5) ; LED8_1_1.2@4476.23,83.08 4476.23,166.5 4507.23,197.5 4813.57,197.5 v1(4814.57,196.5) ; LED8_1.2@8780.8,83.08 8780.8,166.5 8811.8,197.5 9118.14,197.5 v1(9119.14,196.5) ; pad.@13534,280 13589,280 ; pad.@13699,280 pad.@26389,280 ; LED8_1_2_1.2@13816.67,98.08 13816.67,181.5 13847.67,212.5 14154,212.5 v1(14155,211.5) ; LED8_1_1_1.2@18121.23,98.08 18121.23,181.5 18152.23,212.5 18458.57,212.5 v1(18459.57,211.5) ; LED8_1_3.2@22425.8,98.08 22425.8,181.5 22456.8,212.5 22763.14,212.5 v1(22764.14,211.5)
  Top Layer w15: -56,265 pad.@54,265 ; 13589,280 pad.@13699,280
  Bottom Layer w10: pad.@54,265 353.86,265 421.36,197.5 509,197.5 v1(510,196.5) ; v1@508,198.5 509,199.5 4632.58,199.5 4633.58,198.5 9117.83,198.5 v1@9118.64,199.31 ; v1(9119.14,196.5) 9121.14,198.5 12455.24,198.5 12521.74,265 pad.@12744,265 12799,265 ; pad.@13699,280 13998.86,280 14066.36,212.5 14154,212.5 v1(14155,211.5) ; v1@14153,213.5 14154,214.5 18277.58,214.5 18278.58,213.5 22762.83,213.5 v1@22763.64,214.31 ; v1(22764.14,211.5) 22766.14,213.5 26100.24,213.5 26166.74,280 pad.@26389,280 26444,280
  Bottom Layer w15: 12799,265 pad.@12909,265 ; 26444,280 pad.@26554,280

## Polygon pours and split planes (outlines as drawn)
COM1 on Top Layer "LA_COM1_T" (hatched 45Degree grid 7.87 track 8, pour order 8): 118.43,-243.35 118.43,210.07 cw(c123.45,210.07) 118.5,210.86 cw(c123.45,211.65) 123.45,216.66 4218.43,216.66 cw(c4218.43,211.65) 4223.44,211.65 cw(c4218.43,211.65) 4223.38,210.86 cw(c4218.43,210.07) 4223.44,210.07 4223.44,-243.35 cw(c4218.43,-243.35) 4218.43,-248.36 123.45,-248.36 cw(c123.45,-243.35)
COM1 on Top Layer "LA_COM1_T" (hatched 45Degree grid 7.87 track 8, pour order 10): 4328,-243.35 4328,210.07 cw(c4333.02,210.07) 4328.06,210.86 cw(c4333.02,211.65) 4333.02,216.66 8427.99,216.66 cw(c8427.99,211.65) 8433.01,211.65 cw(c8427.99,211.65) 8432.95,210.86 cw(c8427.99,210.07) 8433.01,210.07 8433.01,-243.35 cw(c8427.99,-243.35) 8427.99,-248.36 4333.02,-248.36 cw(c4333.02,-243.35)
COM1 on Top Layer "LA_COM1_T" (hatched 45Degree grid 7.87 track 8, pour order 12): 8610.96,-243.35 8610.96,210.07 cw(c8615.98,210.07) 8611.02,210.86 cw(c8615.98,211.65) 8615.98,216.66 12710.95,216.66 cw(c12710.95,211.65) 12715.97,211.65 cw(c12710.95,211.65) 12715.91,210.86 cw(c12710.95,210.07) 12715.97,210.07 12715.97,-243.35 cw(c12710.95,-243.35) 12710.95,-248.36 8615.98,-248.36 cw(c8615.98,-243.35)
COM1 on Top Layer "LA_COM1_T" (hatched 45Degree grid 7.87 track 8, pour order 11): 22255.96,-228.35 22255.96,225.07 cw(c22260.98,225.07) 22256.02,225.86 cw(c22260.98,226.65) 22260.98,231.66 26355.95,231.66 cw(c26355.95,226.65) 26360.97,226.65 cw(c26355.95,226.65) 26360.91,225.86 cw(c26355.95,225.07) 26360.97,225.07 26360.97,-228.35 cw(c26355.95,-228.35) 26355.95,-233.36 22260.98,-233.36 cw(c22260.98,-228.35)
COM1 on Top Layer "LA_COM1_T" (hatched 45Degree grid 7.87 track 8, pour order 9): 17973,-228.35 17973,225.07 cw(c17978.02,225.07) 17973.06,225.86 cw(c17978.02,226.65) 17978.02,231.66 22072.99,231.66 cw(c22072.99,226.65) 22078.01,226.65 cw(c22072.99,226.65) 22077.95,225.86 cw(c22072.99,225.07) 22078.01,225.07 22078.01,-228.35 cw(c22072.99,-228.35) 22072.99,-233.36 17978.02,-233.36 cw(c17978.02,-228.35)
COM1 on Top Layer "LA_COM1_T" (hatched 45Degree grid 7.87 track 8, pour order 7): 13763.43,-228.35 13763.43,225.07 cw(c13768.45,225.07) 13763.5,225.86 cw(c13768.45,226.65) 13768.45,231.66 17863.42,231.66 cw(c17863.42,226.65) 17868.44,226.65 cw(c17863.42,226.65) 17868.38,225.86 cw(c17863.42,225.07) 17868.44,225.07 17868.44,-228.35 cw(c17863.42,-228.35) 17863.42,-233.36 13768.45,-233.36 cw(c13768.45,-228.35)

## Silkscreen, mask and mechanical layers (free items; w line width, h text height)
Top Overlay:
  lines w10: 0,-448.5 0,448.5 ; 12855,-448.5 12855,448.5 ; 13645,-433.5 13645,463.5 ; 26558.7,-433.5 26558.7,463.5
  text "LEDArrayFPC - 24 LED" at 24937.33,-190.54 h20 r90
  text "RevB" at 24974.68,-192.64 h20 r90
  text "adrian.gin@gmail.com" at 25009.34,-192.64 h20 r90
  text "COM3" at 17654.5,-203.5 h20
  text "COM2" at 18099.93,-203.5 h20
  text "LEDArrayFPC - 24 LED" at 11292.33,-205.54 h20 r90
  text "RevB" at 11329.68,-207.64 h20 r90
  text "adrian.gin@gmail.com" at 11364.34,-207.64 h20 r90
  text "COM1" at 22428.16,-210.85 h20
  text "COM3" at 4009.5,-218.5 h20
  text "COM2" at 4454.93,-218.5 h20
  text "COM1" at 8783.16,-225.85 h20
Mechanical 15:
  lines w10: 459.4,-243.35 454.38,-248.36 236.01,-466.74 236.01,-468.35 126.01,-468.35 -199.85,-468.35 -199.85,471.65 169.55,471.65 428.7,212.5 431.72,212.5 4163.43,211.65 8160.58,211.65 9145.15,211.65 12445,211.65 ; 460.82,-243.35 4163.43,-243.35 ; 4163.43,210.07 4163.43,-243.35 ; 4373.02,-243.35 4373.02,210.07 ; 12405,211.65 12445,211.65 ; 14104.4,-228.35 14099.38,-233.36 13881.01,-451.74 13881.01,-453.35 13771.01,-453.35 13445.15,-453.35 13445.15,486.65 13814.55,486.65 14073.7,227.5 14076.72,227.5 17808.42,226.65 21805.58,226.65 22790.15,226.65 26090,226.65 ; 14105.82,-228.35 17808.42,-228.35 ; 17808.42,225.07 17808.42,-228.35 ; 18018.02,-228.35 18018.02,225.07 ; 26050,226.65 26090,226.65 ; 4163.43,-243.35 8140.58,-243.35 9070.15,-243.35 12445.15,-243.35 12670.15,-468.35 12928.62,-468.35 12928.62,471.65 12705,471.65 12445,211.65 ; 17808.42,-228.35 21785.58,-228.35 22715.15,-228.35 26090.15,-228.35 26315.15,-453.35 26573.62,-453.35 26573.62,486.65 26350,486.65 26090,226.65